# EAGLE board rev0.1x (EAGLE 8.3.1)
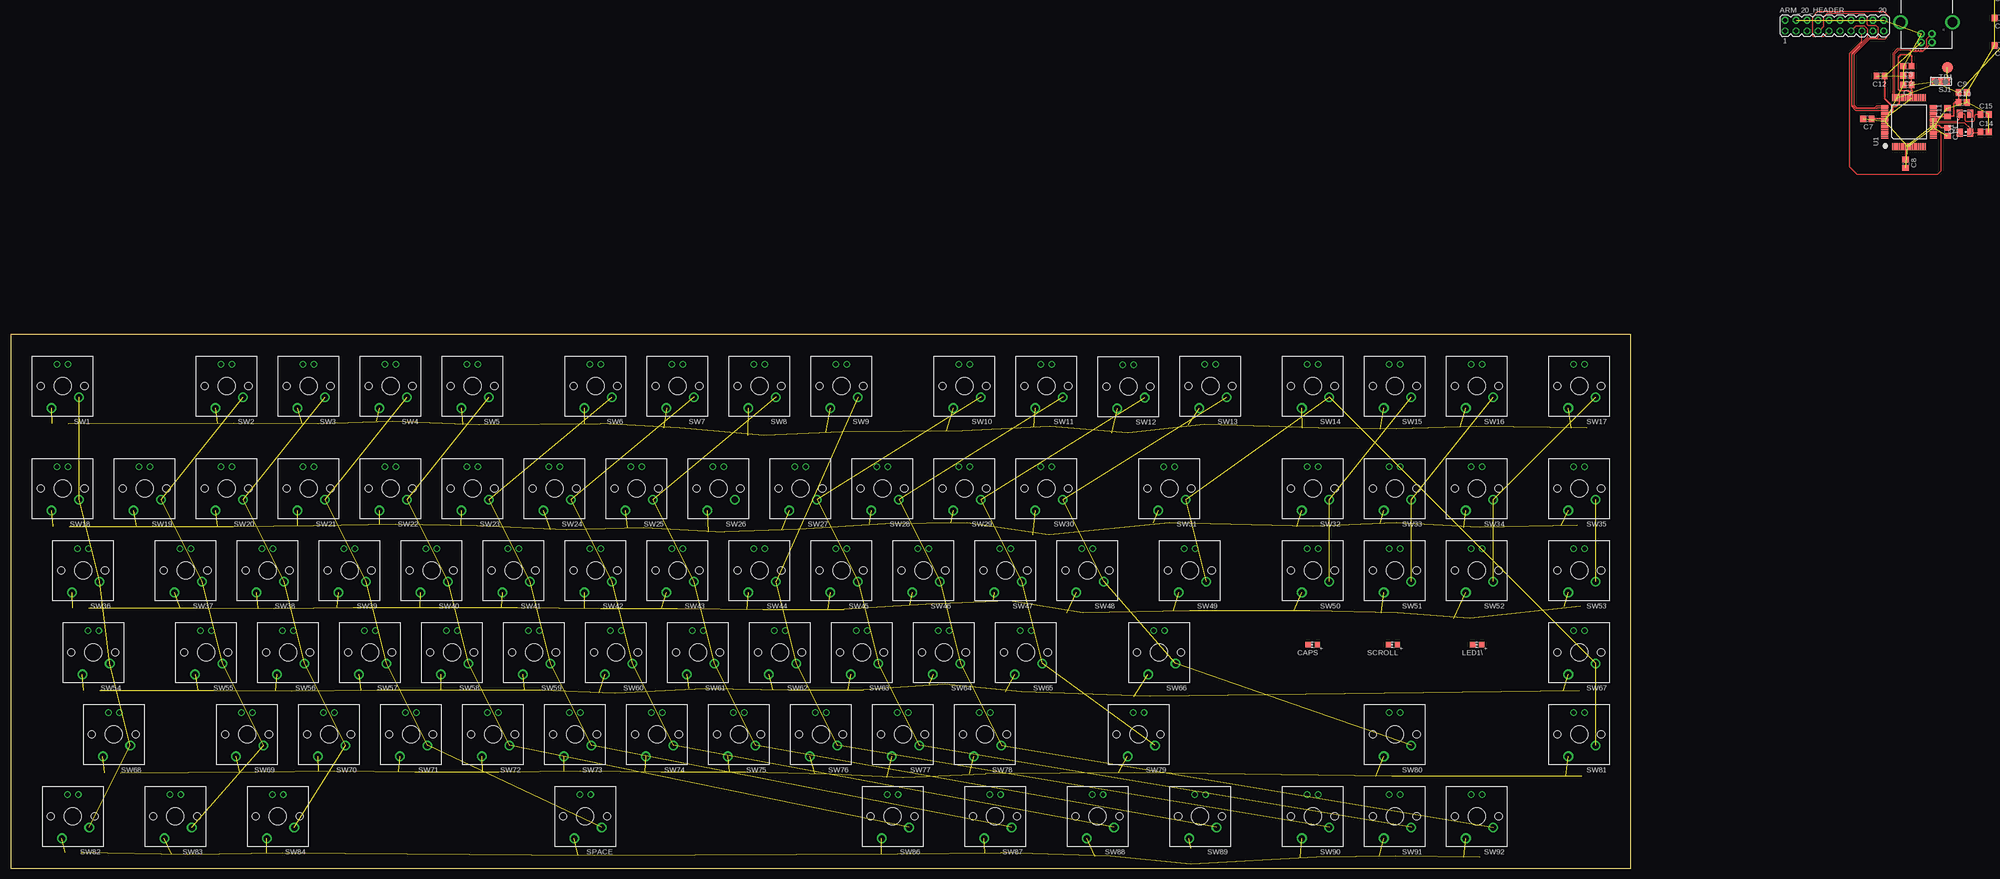
[diagram p0: board, top side]
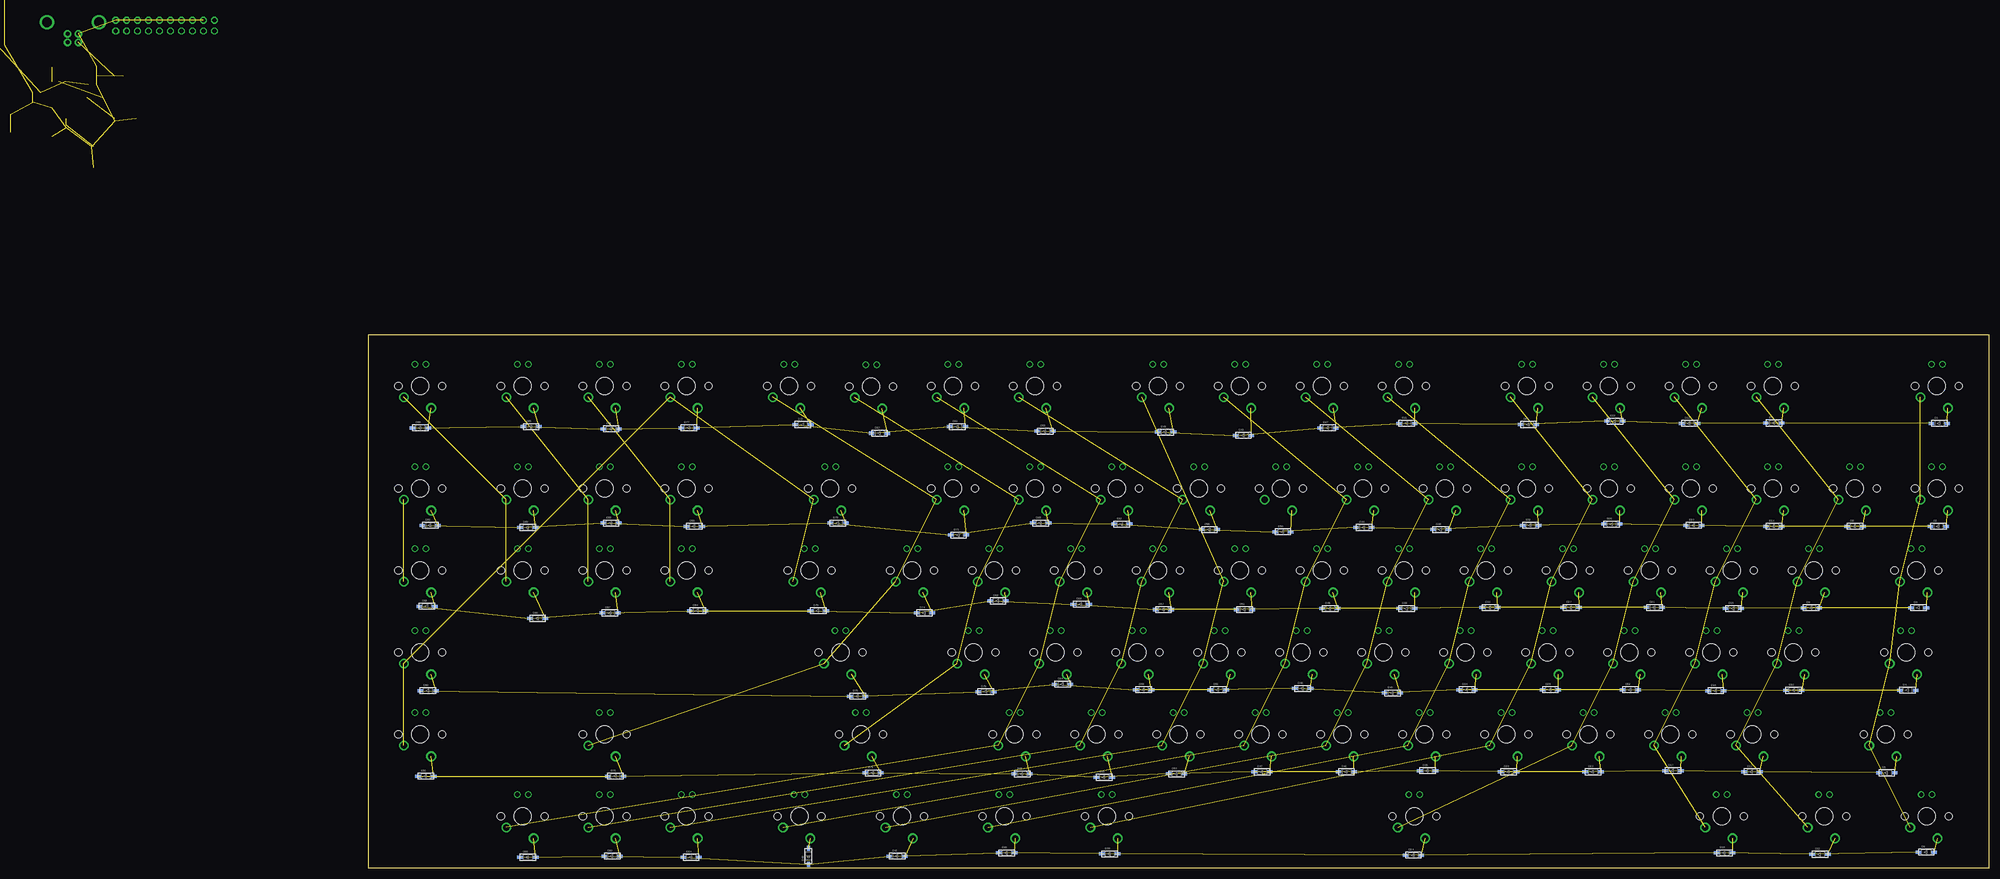
[diagram p1: board, bottom side, seen from below]

Size 375.5 x 123.75 mm. Coordinates in mm from the lower left corner, seen from the top.
Outline: 0,0 375.5,0 375.5,123.75 0,123.75 0,0
Copper layers (1*16): TOP 0.035mm / dielectric 0.33mm / BOTTOM 0.035mm
Design rules "alleybeachdrc4layer *": minimum track width 6mil, minimum drill 0.3mm, track to track 6mil, track to pad 6mil, pad to pad 6mil, via to via 6mil, smd to smd 6mil, copper to edge 10mil, drill to drill 0.3mm, minimum pad ring 10mil, minimum via ring 8mil, stop-mask expansion 5mil, vias tented up to drill 0.3mm, thermal gap 10mil

## Footprints (pad centres in the part's own frame; a part is rotated, then mirrored left to right if it is on the bottom)
MA10-2 = drill 1.016 octagon: 1 -11.43,-1.27; 2 -11.43,1.27; 3 -8.89,-1.27; 4 -8.89,1.27; 5 -6.35,-1.27; 6 -6.35,1.27; 7 -3.81,-1.27; 8 -3.81,1.27; 9 -1.27,-1.27; 10 -1.27,1.27; 11 1.27,-1.27; 12 1.27,1.27; 13 3.81,-1.27; 14 3.81,1.27; 15 6.35,-1.27; 16 6.35,1.27; 17 8.89,-1.27; 18 8.89,1.27; 19 11.43,-1.27; 20 11.43,1.27
C0805 = smd 1.3 x 1.5: 1 -0.95,0; 2 0.95,0
CHIP-LED0805 = smd 1.2 x 1.2: A 0,-1.05; C 0,1.05
SOD-123 = smd 1.2 x 0.7: A 1.85,0; C -1.85,0
USB-B-PTH = drill 0.914 pad 1.676: D+ 0,1.25; D- 1.981,1.25; GND 0,-1.25; VBUS 1.981,-1.25 | drill 2.286: S1 -2.718,-6.02; S2 -2.718,6.02
CTS406 = smd 1.9 x 1.4: 1 -2.2,-1.2; 2 2.2,-1.2; 3 2.2,1.2; 4 -2.2,1.2
SJ_2 = smd 1.168 x 1.6: 1 -1.524,0; 2 0,0; 3 1.524,0
CHERRY_MX = drill 1.5: 1 -3.81,2.54; 2 2.54,5.08 | drill 1: A -1.27,-5.08; K 1.27,-5.08 | hole 4: 0,0 | hole 1.7: 5.08,0; -5.08,0
B2,54 = smd 2.54 x 2.54: TP 0,0
EFM32LG332F256G-E-QFP64 = smd 1.6 x 0.3: 1 -5.65,3.75; 2 -5.65,3.25; 3 -5.65,2.75; 4 -5.65,2.25; 5 -5.65,1.75; 6 -5.65,1.25; 7 -5.65,0.75; 8 -5.65,0.25; 9 -5.65,-0.25; 10 -5.65,-0.75; 11 -5.65,-1.25; 12 -5.65,-1.75; 13 -5.65,-2.25; 14 -5.65,-2.75; 15 -5.65,-3.25; 16 -5.65,-3.75; 33 5.65,-3.75; 34 5.65,-3.25; 35 5.65,-2.75; 36 5.65,-2.25; 37 5.65,-1.75; 38 5.65,-1.25; 39 5.65,-0.75; 40 5.65,-0.25; 41 5.65,0.25; 42 5.65,0.75; 43 5.65,1.25; 44 5.65,1.75; 45 5.65,2.25; 46 5.65,2.75; 47 5.65,3.25; 48 5.65,3.75 | smd 0.3 x 1.6: 17 -3.75,-5.65; 18 -3.25,-5.65; 19 -2.75,-5.65; 20 -2.25,-5.65; 21 -1.75,-5.65; 22 -1.25,-5.65; 23 -0.75,-5.65; 24 -0.25,-5.65; 25 0.25,-5.65; 26 0.75,-5.65; 27 1.25,-5.65; 28 1.75,-5.65; 29 2.25,-5.65; 30 2.75,-5.65; 31 3.25,-5.65; 32 3.75,-5.65; 49 3.75,5.65; 50 3.25,5.65; 51 2.75,5.65; 52 2.25,5.65; 53 1.75,5.65; 54 1.25,5.65; 55 0.75,5.65; 56 0.25,5.65; 57 -0.25,5.65; 58 -0.75,5.65; 59 -1.25,5.65; 60 -1.75,5.65; 61 -2.25,5.65; 62 -2.75,5.65; 63 -3.25,5.65; 64 -3.75,5.65

## Placement (x,y rotation side)
ARM_20_HEADER  [MA10-2]  422.66,195.33 0 top  (outside the outline)
C1  0.1uF  [C0805]  439.55,181.61 180 top  (outside the outline)
C2  10uF  [C0805]  439.55,183.77 180 top  (outside the outline)
C3  1uF  [C0805]  439.55,185.93 180 top  (outside the outline)
C4  10uF  [C0805]  460.76,190.75 180 top  (outside the outline)
C5  1uF  [C0805]  460.76,197.1 180 top  (outside the outline)
C6  0.1uF  [C0805]  460.76,203.45 180 top  (outside the outline)
C7  0.1uF  [C0805]  430.28,173.74 180 top  (outside the outline)
C8  0.1uF  [C0805]  439.17,163.32 270 top  (outside the outline)
C9  0.1uF  [C0805]  452.37,179.83 0 top  (outside the outline)
C10  10uF  [C0805]  452.37,177.55 0 top  (outside the outline)
C11  0.1uF  [C0805]  448.82,175.26 90 top  (outside the outline)
C12  4.7uF  [C0805]  433.32,183.64 180 top  (outside the outline)
C13  0.1uF  [C0805]  448.82,170.69 270 top  (outside the outline)
C14  22pF  [C0805]  457.45,170.69 0 top  (outside the outline)
C15  22pF  [C0805]  457.45,174.75 0 top  (outside the outline)
CAPS  [CHIP-LED0805]  301.75,51.82 90 top
D1  [SOD-123]  11.43,103.12 0 bottom
D2  [SOD-123]  11.67,79.26 0 bottom
D3  [SOD-123]  16.25,60.38 0 bottom
D4  [SOD-123]  18.79,41.24 0 bottom
D5  [SOD-123]  23.61,22.11 0 bottom
D6  [SOD-123]  14.47,3.73 0 bottom
D7  [SOD-123]  49.77,103.22 0 bottom
D8  [SOD-123]  30.98,79.26 0 bottom
D9  [SOD-123]  41.14,60.38 0 bottom
D10  [SOD-123]  45.2,41.24 0 bottom
D11  [SOD-123]  54.85,22.36 0 bottom
D12  [SOD-123]  39.11,3.23 0 bottom
D13  [SOD-123]  69.34,103.12 0 bottom
D14  [SOD-123]  49.78,79.25 0 bottom
D15  [SOD-123]  59.18,60.2 0 bottom
D16  [SOD-123]  63.25,41.15 0 bottom
D17  [SOD-123]  73.15,22.61 0 bottom
D18  [SOD-123]  61.21,3.56 0 bottom
D19  [SOD-123]  86.61,103.63 0 bottom
D20  [SOD-123]  68.33,79.5 0 bottom
D21  [SOD-123]  77.47,60.45 0 bottom
D22  [SOD-123]  83.06,41.4 0 bottom
D23  [SOD-123]  91.69,22.35 0 bottom
D24  [SOD-123]  133.35,3.05 0 bottom
D25  [SOD-123]  106.68,102.87 0 bottom
D26  [SOD-123]  87.38,79.76 0 bottom
D27  [SOD-123]  96.77,60.45 0 bottom
D28  [SOD-123]  101.6,41.4 0 bottom
D29  [SOD-123]  111.25,22.35 0 bottom
D30  [SOD-123]  203.71,3.3 0 bottom
D31  [SOD-123]  134.87,103.12 0 bottom
D32  [SOD-123]  106.17,79.5 0 bottom
D33  [SOD-123]  115.57,60.45 0 bottom
D34  [SOD-123]  120.9,41.4 0 bottom
D35  [SOD-123]  130.05,22.61 0 bottom
D36  [SOD-123]  227.58,3.56 0 bottom
D37  [SOD-123]  153.16,102.11 0 bottom
D38  [SOD-123]  127,78.49 0 bottom
D39  [SOD-123]  134.87,60.2 0 bottom
D40  [SOD-123]  138.18,40.64 0 bottom
D41  [SOD-123]  148.84,22.35 0 bottom
D42  [SOD-123]  252.98,2.79 0 bottom
D43  [SOD-123]  172.72,100.33 0 bottom
D44  [SOD-123]  144.78,78.99 0 bottom
D45  [SOD-123]  152.65,60.2 0 bottom
D46  [SOD-123]  159,41.66 0 bottom
D47  [SOD-123]  168.4,22.35 0 bottom
D48  [SOD-123]  273.56,2.79 90 bottom
D49  [SOD-123]  190.75,101.09 0 bottom
D50  [SOD-123]  163.58,77.98 0 bottom
D51  [SOD-123]  172.47,59.94 0 bottom
D52  [SOD-123]  178.56,41.4 0 bottom
D53  [SOD-123]  188.21,21.84 0 bottom
D54  [SOD-123]  300.74,2.54 0 bottom
D55  [SOD-123]  218.69,101.35 0 bottom
D56  [SOD-123]  180.59,78.49 0 bottom
D57  [SOD-123]  191.26,59.94 0 bottom
D58  [SOD-123]  195.83,41.4 0 bottom
D59  [SOD-123]  204.98,21.08 0 bottom
D60  [SOD-123]  319.02,2.79 0 bottom
D61  [SOD-123]  239.01,102.36 0 bottom
D62  [SOD-123]  200.91,79.76 0 bottom
D63  [SOD-123]  210.31,61.21 0 bottom
D64  [SOD-123]  214.63,42.67 0 bottom
D65  [SOD-123]  224.03,21.84 0 bottom
D66  [SOD-123]  338.58,2.54 0 bottom
D67  [SOD-123]  257.05,100.84 0 bottom
D68  [SOD-123]  219.71,80.01 0 bottom
D69  [SOD-123]  229.62,61.98 0 bottom
D70  [SOD-123]  232.41,40.89 0 bottom
D71  [SOD-123]  258.57,22.1 0 bottom
D72  [SOD-123]  274.83,102.87 0 bottom
D73  [SOD-123]  238.76,77.22 0 bottom
D74  [SOD-123]  246.63,59.18 0 bottom
D75  [SOD-123]  262.13,39.88 0 bottom
D76  [SOD-123]  318.26,21.34 0 bottom
D77  [SOD-123]  301.24,102.11 0 bottom
D78  [SOD-123]  266.7,80.01 0 bottom
D79  [SOD-123]  271.27,59.69 0 bottom
D80  [SOD-123]  361.7,41.15 0 bottom
D81  [SOD-123]  362.2,21.34 0 bottom
D82  [SOD-123]  319.28,101.85 0 bottom
D83  [SOD-123]  299.97,79.25 0 bottom
D84  [SOD-123]  299.21,59.69 0 bottom
D85  [SOD-123]  337.82,102.36 0 bottom
D86  [SOD-123]  319.28,80.01 0 bottom
D87  [SOD-123]  319.53,59.18 0 bottom
D88  [SOD-123]  363.47,102.11 0 bottom
D89  [SOD-123]  338.58,78.99 0 bottom
D90  [SOD-123]  336.3,57.91 0 bottom
D91  [SOD-123]  361.19,79.5 0 bottom
D92  [SOD-123]  361.95,60.71 0 bottom
J1  USB-B  [USB-B-PTH]  443.99,193.42 270 top  (outside the outline)
LED1\  [CHIP-LED0805]  339.85,51.82 90 top
Q1  48MHz  [CTS406]  452.88,172.72 90 top  (outside the outline)
SCROLL  [CHIP-LED0805]  320.29,51.82 90 top
SJ1  [SJ_2]  447.29,182.37 180 top  (outside the outline)
SPACE  CHERRY_MX  [CHERRY_MX]  133.12,12 180 top
SW1  CHERRY_MX  [CHERRY_MX]  12,111.75 180 top
SW2  CHERRY_MX  [CHERRY_MX]  50,111.75 180 top
SW3  CHERRY_MX  [CHERRY_MX]  69,111.75 180 top
SW4  CHERRY_MX  [CHERRY_MX]  88,111.75 180 top
SW5  CHERRY_MX  [CHERRY_MX]  107,111.75 180 top
SW6  CHERRY_MX  [CHERRY_MX]  135.5,111.75 180 top
SW7  CHERRY_MX  [CHERRY_MX]  154.5,111.75 180 top
SW8  CHERRY_MX  [CHERRY_MX]  173.5,111.75 180 top
SW9  CHERRY_MX  [CHERRY_MX]  192.5,111.75 180 top
SW10  CHERRY_MX  [CHERRY_MX]  221,111.75 180 top
SW11  CHERRY_MX  [CHERRY_MX]  240,111.75 180 top
SW12  CHERRY_MX  [CHERRY_MX]  259,111.65 180 top
SW13  CHERRY_MX  [CHERRY_MX]  278,111.75 180 top
SW14  CHERRY_MX  [CHERRY_MX]  301.75,111.75 180 top
SW15  CHERRY_MX  [CHERRY_MX]  320.75,111.75 180 top
SW16  CHERRY_MX  [CHERRY_MX]  339.75,111.75 180 top
SW17  CHERRY_MX  [CHERRY_MX]  363.5,111.75 180 top
SW18  CHERRY_MX  [CHERRY_MX]  12,88 180 top
SW19  CHERRY_MX  [CHERRY_MX]  31,88 180 top
SW20  CHERRY_MX  [CHERRY_MX]  50,88 180 top
SW21  CHERRY_MX  [CHERRY_MX]  69,88 180 top
SW22  CHERRY_MX  [CHERRY_MX]  88,88 180 top
SW23  CHERRY_MX  [CHERRY_MX]  107,88 180 top
SW24  CHERRY_MX  [CHERRY_MX]  126,88 180 top
SW25  CHERRY_MX  [CHERRY_MX]  145,88 180 top
SW26  CHERRY_MX  [CHERRY_MX]  164,88 180 top
SW27  CHERRY_MX  [CHERRY_MX]  183,88 180 top
SW28  CHERRY_MX  [CHERRY_MX]  202,88 180 top
SW29  CHERRY_MX  [CHERRY_MX]  221,88 180 top
SW30  CHERRY_MX  [CHERRY_MX]  240,88 180 top
SW31  CHERRY_MX  [CHERRY_MX]  268.5,88 180 top
SW32  CHERRY_MX  [CHERRY_MX]  301.75,88 180 top
SW33  CHERRY_MX  [CHERRY_MX]  320.75,88 180 top
SW34  CHERRY_MX  [CHERRY_MX]  339.75,88 180 top
SW35  CHERRY_MX  [CHERRY_MX]  363.5,88 180 top
SW36  CHERRY_MX  [CHERRY_MX]  16.75,69 180 top
SW37  CHERRY_MX  [CHERRY_MX]  40.5,69 180 top
SW38  CHERRY_MX  [CHERRY_MX]  59.5,69 180 top
SW39  CHERRY_MX  [CHERRY_MX]  78.5,69 180 top
SW40  CHERRY_MX  [CHERRY_MX]  97.5,69 180 top
SW41  CHERRY_MX  [CHERRY_MX]  116.5,69 180 top
SW42  CHERRY_MX  [CHERRY_MX]  135.5,69 180 top
SW43  CHERRY_MX  [CHERRY_MX]  154.5,69 180 top
SW44  CHERRY_MX  [CHERRY_MX]  173.5,69 180 top
SW45  CHERRY_MX  [CHERRY_MX]  192.5,69 180 top
SW46  CHERRY_MX  [CHERRY_MX]  211.5,69 180 top
SW47  CHERRY_MX  [CHERRY_MX]  230.5,69 180 top
SW48  CHERRY_MX  [CHERRY_MX]  249.5,69 180 top
SW49  CHERRY_MX  [CHERRY_MX]  273.25,69 180 top
SW50  CHERRY_MX  [CHERRY_MX]  301.75,69 180 top
SW51  CHERRY_MX  [CHERRY_MX]  320.75,69 180 top
SW52  CHERRY_MX  [CHERRY_MX]  339.75,69 180 top
SW53  CHERRY_MX  [CHERRY_MX]  363.5,69 180 top
SW54  CHERRY_MX  [CHERRY_MX]  19.12,50 180 top
SW55  CHERRY_MX  [CHERRY_MX]  45.25,50 180 top
SW56  CHERRY_MX  [CHERRY_MX]  64.25,50 180 top
SW57  CHERRY_MX  [CHERRY_MX]  83.25,50 180 top
SW58  CHERRY_MX  [CHERRY_MX]  102.25,50 180 top
SW59  CHERRY_MX  [CHERRY_MX]  121.25,50 180 top
SW60  CHERRY_MX  [CHERRY_MX]  140.25,50 180 top
SW61  CHERRY_MX  [CHERRY_MX]  159.25,50 180 top
SW62  CHERRY_MX  [CHERRY_MX]  178.25,50 180 top
SW63  CHERRY_MX  [CHERRY_MX]  197.25,50 180 top
SW64  CHERRY_MX  [CHERRY_MX]  216.25,50 180 top
SW65  CHERRY_MX  [CHERRY_MX]  235.25,50 180 top
SW66  CHERRY_MX  [CHERRY_MX]  266.12,50 180 top
SW67  CHERRY_MX  [CHERRY_MX]  363.5,50 180 top
SW68  CHERRY_MX  [CHERRY_MX]  23.88,31 180 top
SW69  CHERRY_MX  [CHERRY_MX]  54.75,31 180 top
SW70  CHERRY_MX  [CHERRY_MX]  73.75,31 180 top
SW71  CHERRY_MX  [CHERRY_MX]  92.75,31 180 top
SW72  CHERRY_MX  [CHERRY_MX]  111.75,31 180 top
SW73  CHERRY_MX  [CHERRY_MX]  130.75,31 180 top
SW74  CHERRY_MX  [CHERRY_MX]  149.75,31 180 top
SW75  CHERRY_MX  [CHERRY_MX]  168.75,31 180 top
SW76  CHERRY_MX  [CHERRY_MX]  187.75,31 180 top
SW77  CHERRY_MX  [CHERRY_MX]  206.75,31 180 top
SW78  CHERRY_MX  [CHERRY_MX]  225.75,31 180 top
SW79  CHERRY_MX  [CHERRY_MX]  261.38,31 180 top
SW80  CHERRY_MX  [CHERRY_MX]  320.75,31 180 top
SW81  CHERRY_MX  [CHERRY_MX]  363.5,31 180 top
SW82  CHERRY_MX  [CHERRY_MX]  14.38,12 180 top
SW83  CHERRY_MX  [CHERRY_MX]  38.12,12 180 top
SW84  CHERRY_MX  [CHERRY_MX]  61.88,12 180 top
SW86  CHERRY_MX  [CHERRY_MX]  204.38,12 180 top
SW87  CHERRY_MX  [CHERRY_MX]  228.12,12 180 top
SW88  CHERRY_MX  [CHERRY_MX]  251.88,12 180 top
SW89  CHERRY_MX  [CHERRY_MX]  275.62,12 180 top
SW90  CHERRY_MX  [CHERRY_MX]  301.75,12 180 top
SW91  CHERRY_MX  [CHERRY_MX]  320.75,12 180 top
SW92  CHERRY_MX  [CHERRY_MX]  339.75,12 180 top
TP1  PTR1B2,54  [B2,54]  448.82,185.67 180 top  (outside the outline)
U1  EFM32LG332F256G-E-QFP64  [EFM32LG332F256G-E-QFP64]  439.93,172.97 90 top  (outside the outline)

## Library data of the parts
ARM_20_HEADER = con-lstb; OC_FARNELL: unknown; OC_NEWARK: unknown
C1-C15 = resistor
CAPS D1-D92 LED1\ SCROLL = adafruit
J1 = SparkFun-Connectors; PROD_ID: CONN-08278
Q1 = adafruit; OC_FARNELL: unknown; OC_NEWARK: unknown
SJ1 = jumper
SPACE SW1-SW84 SW86-SW92 = ALLEYBEACH_LIB
TP1 = testpad
U1 = clackboard_lib

## Nets
C1: SW1.1 SW18.1 SW36.1 SW54.1 SW68.1 SW82.1
C2: SW2.1 SW19.1 SW37.1 SW55.1 SW69.1 SW83.1
C3: SW3.1 SW20.1 SW38.1 SW56.1 SW70.1 SW84.1
C4: SPACE.1 SW4.1 SW21.1 SW39.1 SW57.1 SW71.1
C5: SW5.1 SW22.1 SW40.1 SW58.1 SW72.1 SW86.1
C6: SW6.1 SW23.1 SW41.1 SW59.1 SW73.1 SW87.1
GND: ARM_20_HEADER.4 ARM_20_HEADER.6 ARM_20_HEADER.8 ARM_20_HEADER.10 ARM_20_HEADER.12 ARM_20_HEADER.14 ARM_20_HEADER.16 ARM_20_HEADER.18 ARM_20_HEADER.20 C1.2 C2.2 C3.2 C4.2 C5.2 C6.2 C7.2 C8.2 C9.2 C10.2 C11.2 C12.2 C13.2 C14.2 C15.2 J1.GND U1.8 U1.22 U1.56
N$1: SJ1.1 TP1.TP
N$2: C3.1 U1.40
N$3: C15.1 Q1.3 U1.25
N$4: C14.1 Q1.1 U1.24
N$6: D88.A SW17.2
N$7: D6.A SW82.2
N$8: D5.A SW68.2
N$9: D4.A SW54.2
N$10: D3.A SW36.2
N$11: D2.A SW18.2
N$12: D1.A SW1.2
N$13: D91.A SW35.2
N$14: D7.A SW2.2
N$15: D12.A SW83.2
N$16: D11.A SW69.2
N$17: D10.A SW55.2
N$18: D9.A SW37.2
N$19: D8.A SW19.2
N$20: D92.A SW53.2
N$21: D90.A SW52.2
N$22: D89.A SW34.2
N$23: D85.A SW16.2
N$24: SW7.1 SW24.1 SW42.1 SW60.1 SW74.1 SW88.1
N$25: SW8.1 SW25.1 SW43.1 SW61.1 SW75.1 SW89.1
N$26: SW9.1 SW44.1 SW62.1 SW76.1 SW90.1
N$27: SW10.1 SW27.1 SW45.1 SW63.1 SW77.1 SW91.1
N$28: SW11.1 SW28.1 SW46.1 SW64.1 SW78.1 SW92.1
N$29: SW12.1 SW29.1 SW47.1 SW65.1 SW79.1
N$30: SW13.1 SW30.1 SW48.1 SW66.1 SW80.1
N$31: SW14.1 SW31.1 SW49.1 SW67.1 SW81.1
N$32: SW15.1 SW32.1 SW50.1
N$33: SW16.1 SW33.1 SW51.1
N$34: SW17.1 SW34.1 SW52.1
N$35: SW35.1 SW53.1
N$36: D14.A SW20.2
N$37: D13.A SW3.2
N$38: D15.A SW38.2
N$39: D21.A SW39.2
N$40: D20.A SW21.2
N$41: D22.A SW57.2
N$42: D16.A SW56.2
N$43: D17.A SW70.2
N$44: D23.A SW71.2
N$45: D24.A SPACE.2
N$46: D18.A SW84.2
N$47: D19.A SW4.2
N$48: D25.A SW5.2
N$49: D31.A SW6.2
N$50: D26.A SW22.2
N$51: D32.A SW23.2
N$52: D33.A SW41.2
N$53: D27.A SW40.2
N$54: D28.A SW58.2
N$55: D34.A SW59.2
N$56: D35.A SW73.2
N$57: D29.A SW72.2
N$58: D30.A SW86.2
N$59: D36.A SW87.2
N$60: D86.A SW33.2
N$61: D87.A SW51.2
N$62: D84.A SW50.2
N$63: D83.A SW32.2
N$64: D82.A SW15.2
N$65: D77.A SW14.2
N$66: D78.A SW31.2
N$67: D79.A SW49.2
N$68: D80.A SW67.2
N$69: D81.A SW81.2
N$70: D76.A SW80.2
N$71: D75.A SW66.2
N$72: D70.A SW65.2
N$73: D71.A SW79.2
N$74: D69.A SW47.2
N$75: D74.A SW48.2
N$76: D73.A SW30.2
N$77: D68.A SW29.2
N$78: D67.A SW12.2
N$79: D72.A SW13.2
N$80: D61.A SW11.2
N$81: D55.A SW10.2
N$82: D56.A SW27.2
N$83: D62.A SW28.2
N$84: D63.A SW46.2
N$85: D57.A SW45.2
N$86: D58.A SW63.2
N$87: D64.A SW64.2
N$88: D65.A SW78.2
N$89: D59.A SW77.2
N$90: D60.A SW91.2
N$91: D66.A SW92.2
N$92: D48.A SW89.2
N$93: D54.A SW90.2
N$94: D47.A SW75.2
N$95: D53.A SW76.2
N$96: D52.A SW62.2
N$97: D46.A SW61.2
N$98: D45.A SW43.2
N$99: D51.A SW44.2
N$100: D50.A SW26.2
N$101: D44.A SW25.2
N$102: D43.A SW8.2
N$103: D49.A SW9.2
N$104: D37.A SW7.2
N$105: D38.A SW24.2
N$106: D39.A SW42.2
N$107: D40.A SW60.2
N$108: D41.A SW74.2
N$109: D42.A SW88.2
R1: D1.C D7.C D13.C D19.C D25.C D31.C D37.C D43.C D49.C D55.C D61.C D67.C D72.C D77.C D82.C D85.C D88.C
R2: D2.C D8.C D14.C D20.C D26.C D32.C D38.C D44.C D50.C D56.C D62.C D68.C D73.C D78.C D83.C D86.C D89.C D91.C
R3: D3.C D9.C D15.C D21.C D27.C D33.C D39.C D45.C D51.C D57.C D63.C D69.C D74.C D79.C D84.C D87.C D90.C D92.C
R4: D4.C D10.C D16.C D22.C D28.C D34.C D40.C D46.C D52.C D58.C D64.C D70.C D75.C D80.C
R5: D5.C D11.C D17.C D23.C D29.C D35.C D41.C D47.C D53.C D59.C D65.C D71.C D76.C D81.C
R6: D6.C D12.C D18.C D24.C D30.C D36.C D42.C D48.C D54.C D60.C D66.C
RESET: ARM_20_HEADER.15 U1.20
SWCLK: ARM_20_HEADER.9 U1.49
SWDIO: ARM_20_HEADER.7 U1.50
SWO: ARM_20_HEADER.13 U1.51
USB1_N: J1.D- U1.47
USB1_P: J1.D+ U1.48
V_TARGET: ARM_20_HEADER.1
VBUS1: C12.1 J1.VBUS U1.45 U1.52
VCC3V3: C1.1 C2.1 C4.1 C5.1 C6.1 C7.1 C8.1 C9.1 C10.1 C11.1 C13.1 SJ1.3 U1.7 U1.23 U1.26 U1.27 U1.39 U1.55
VREG_OUT: SJ1.2 U1.46

## Tracks (layer width: path | path; a pad name or v marks a point on that pad's centre or on a via)
C1  (5 unrouted)
C2  (5 unrouted)
C3  (5 unrouted)
C4  (5 unrouted)
C5  (5 unrouted)
C6  (5 unrouted)
GND  (27 unrouted)
N$1  (1 unrouted)
N$2
  TOP 0.305: U1.40 440.18,179.84 439.8,180.21 437.77,180.21 437.39,180.59 437.39,187.96 438.02,188.59 440.18,188.59 440.56,188.21 440.56,185.99 C3.1
N$3
  TOP 0.152: U1.25 451.1,173.22 451.68,173.81 Q1.3 452.71,174.92 452.88,174.75 452.88,173.48 453.14,173.23 454.91,173.23 455.17,173.48 455.17,174.5 455.42,174.75 C15.1
N$4
  TOP 0.152: U1.24 452.88,172.72 454.08,171.52 Q1.1 456.34,170.52 C14.1
N$6  (1 unrouted)
N$7  (1 unrouted)
N$8  (1 unrouted)
N$9  (1 unrouted)
N$10  (1 unrouted)
N$11  (1 unrouted)
N$12  (1 unrouted)
N$13  (1 unrouted)
N$14  (1 unrouted)
N$15  (1 unrouted)
N$16  (1 unrouted)
N$17  (1 unrouted)
N$18  (1 unrouted)
N$19  (1 unrouted)
N$20  (1 unrouted)
N$21  (1 unrouted)
N$22  (1 unrouted)
N$23  (1 unrouted)
N$24  (5 unrouted)
N$25  (5 unrouted)
N$26  (4 unrouted)
N$27  (5 unrouted)
N$28  (5 unrouted)
N$29  (4 unrouted)
N$30  (4 unrouted)
N$31  (4 unrouted)
N$32  (2 unrouted)
N$33  (2 unrouted)
N$34  (2 unrouted)
N$35  (1 unrouted)
N$36  (1 unrouted)
N$37  (1 unrouted)
N$38  (1 unrouted)
N$39  (1 unrouted)
N$40  (1 unrouted)
N$41  (1 unrouted)
N$42  (1 unrouted)
N$43  (1 unrouted)
N$44  (1 unrouted)
N$45  (1 unrouted)
N$46  (1 unrouted)
N$47  (1 unrouted)
N$48  (1 unrouted)
N$49  (1 unrouted)
N$50  (1 unrouted)
N$51  (1 unrouted)
N$52  (1 unrouted)
N$53  (1 unrouted)
N$54  (1 unrouted)
N$55  (1 unrouted)
N$56  (1 unrouted)
N$57  (1 unrouted)
N$58  (1 unrouted)
N$59  (1 unrouted)
N$60  (1 unrouted)
N$61  (1 unrouted)
N$62  (1 unrouted)
N$63  (1 unrouted)
N$64  (1 unrouted)
N$65  (1 unrouted)
N$66  (1 unrouted)
N$67  (1 unrouted)
N$68  (1 unrouted)
N$69  (1 unrouted)
N$70  (1 unrouted)
N$71  (1 unrouted)
N$72  (1 unrouted)
N$73  (1 unrouted)
N$74  (1 unrouted)
N$75  (1 unrouted)
N$76  (1 unrouted)
N$77  (1 unrouted)
N$78  (1 unrouted)
N$79  (1 unrouted)
N$80  (1 unrouted)
N$81  (1 unrouted)
N$82  (1 unrouted)
N$83  (1 unrouted)
N$84  (1 unrouted)
N$85  (1 unrouted)
N$86  (1 unrouted)
N$87  (1 unrouted)
N$88  (1 unrouted)
N$89  (1 unrouted)
N$90  (1 unrouted)
N$91  (1 unrouted)
N$92  (1 unrouted)
N$93  (1 unrouted)
N$94  (1 unrouted)
N$95  (1 unrouted)
N$96  (1 unrouted)
N$97  (1 unrouted)
N$98  (1 unrouted)
N$99  (1 unrouted)
N$100  (1 unrouted)
N$101  (1 unrouted)
N$102  (1 unrouted)
N$103  (1 unrouted)
N$104  (1 unrouted)
N$105  (1 unrouted)
N$106  (1 unrouted)
N$107  (1 unrouted)
N$108  (1 unrouted)
N$109  (1 unrouted)
R1  (16 unrouted)
R2  (17 unrouted)
R3  (17 unrouted)
R4  (13 unrouted)
R5  (13 unrouted)
R6  (10 unrouted)
RESET
  TOP 0.152: U1.20 447,170.72 447.29,170.43 447.29,161.54 446.53,160.78 427.99,160.78 426.21,162.56 426.21,188.98 429.01,191.77 ARM_20_HEADER.15
SWCLK
  TOP 0.152: ARM_20_HEADER.9 420.12,192.79 417.83,192.79 417.58,193.04 417.58,197.36 418.85,198.63 432.05,198.63 434.09,198.63 435.36,197.36 435.36,193.29 434.29,192.23 430.76,192.23 427.13,188.6 427.13,176.99 427.78,176.33 432.05,176.33 432.44,176.72 U1.49
SWDIO
  TOP 0.152: U1.50 432.51,176.22 432.31,176.03 427.65,176.03 426.82,176.86 426.82,188.72 430.63,192.53 432.56,192.53 432.82,192.79 432.82,194.82 432.31,195.33 430.53,195.33 430.28,195.58 430.28,197.36 429.51,198.12 420.88,198.12 420.12,197.36 420.12,195.07 419.1,194.06 ARM_20_HEADER.7
SWO
  TOP 0.152: ARM_20_HEADER.13 427.74,195.33 429.51,195.33 430.28,194.56 430.28,192.61 426.52,188.85 426.52,176.73 427.53,175.72 U1.51
USB1_N
  TOP 0.152: U1.47 436.68,179.55 436.59,179.64 436.59,188.85 437.39,189.65 440.18,189.65 arc-90 440.33,189.5 440.33,189.46 arc90 440.49,189.31 440.5,189.31 arc90 440.65,189.46 440.65,189.5 arc-90 440.8,189.65 440.81,189.65 arc-90 440.96,189.5 440.96,189.46 arc90 441.12,189.31 441.13,189.31 arc90 441.28,189.46 441.28,189.5 arc-90 441.43,189.65 441.44,189.65 arc-90 441.59,189.5 441.59,189.46 arc90 441.75,189.31 441.76,189.31 arc90 441.91,189.46 441.91,189.5 arc-90 442.06,189.65 442.07,189.65 arc-90 442.22,189.5 442.22,189.46 arc90 442.38,189.31 442.39,189.31 arc90 442.54,189.46 442.54,189.5 arc-90 442.69,189.65 442.7,189.65 arc-90 442.85,189.5 442.85,189.46 arc90 443.01,189.31 443.02,189.31 arc90 443.17,189.46 443.17,189.5 arc-90 443.32,189.65 443.48,189.65 445.24,191.41 J1.D-
USB1_P
  TOP 0.152: U1.48 436.18,179.54 436.28,179.64 436.28,188.98 437.26,189.95 443.36,189.95 444.07,190.67 444.07,192.25 J1.D+
VBUS1  (1 unrouted)
  TOP 0.305: U1.45 437.68,177.33 436.88,176.53 436.12,176.53 | C12.1 434.27,178.37 436.12,176.53 | U1.52 435.83,175.22 436.12,175.51 436.12,176.53
VCC3V3  (8 unrouted)
  TOP 0.305: U1.39 440.68,180.35 440.5,180.53 C1.1 C2.1 | U1.23 446.77,172.22 447.36,171.64 C13.1 | 447.25,174.22 448.73,174.22 C11.1 450.15,174.31 450.34,174.5 450.34,177.29 450.6,177.55 C10.1 C9.1 | 447.25,174.22 U1.27 | U1.26 446.75,173.72 447.25,174.22 | U1.7 439.18,164.28 C8.1 | U1.55 431.24,173.72 C7.1
VREG_OUT  (1 unrouted)